# Altium PCB PCB走線.pcbdoc (part 2 of 2)
Units mm, origin at the board's own origin, x right, y up, seen from the top; angles counter-clockwise.
Board outline 119.98 x 131.06 mm, 2 copper layers (Top Layer, Bottom Layer); 151 components, 85 nets, 449 pads, 663 vias.
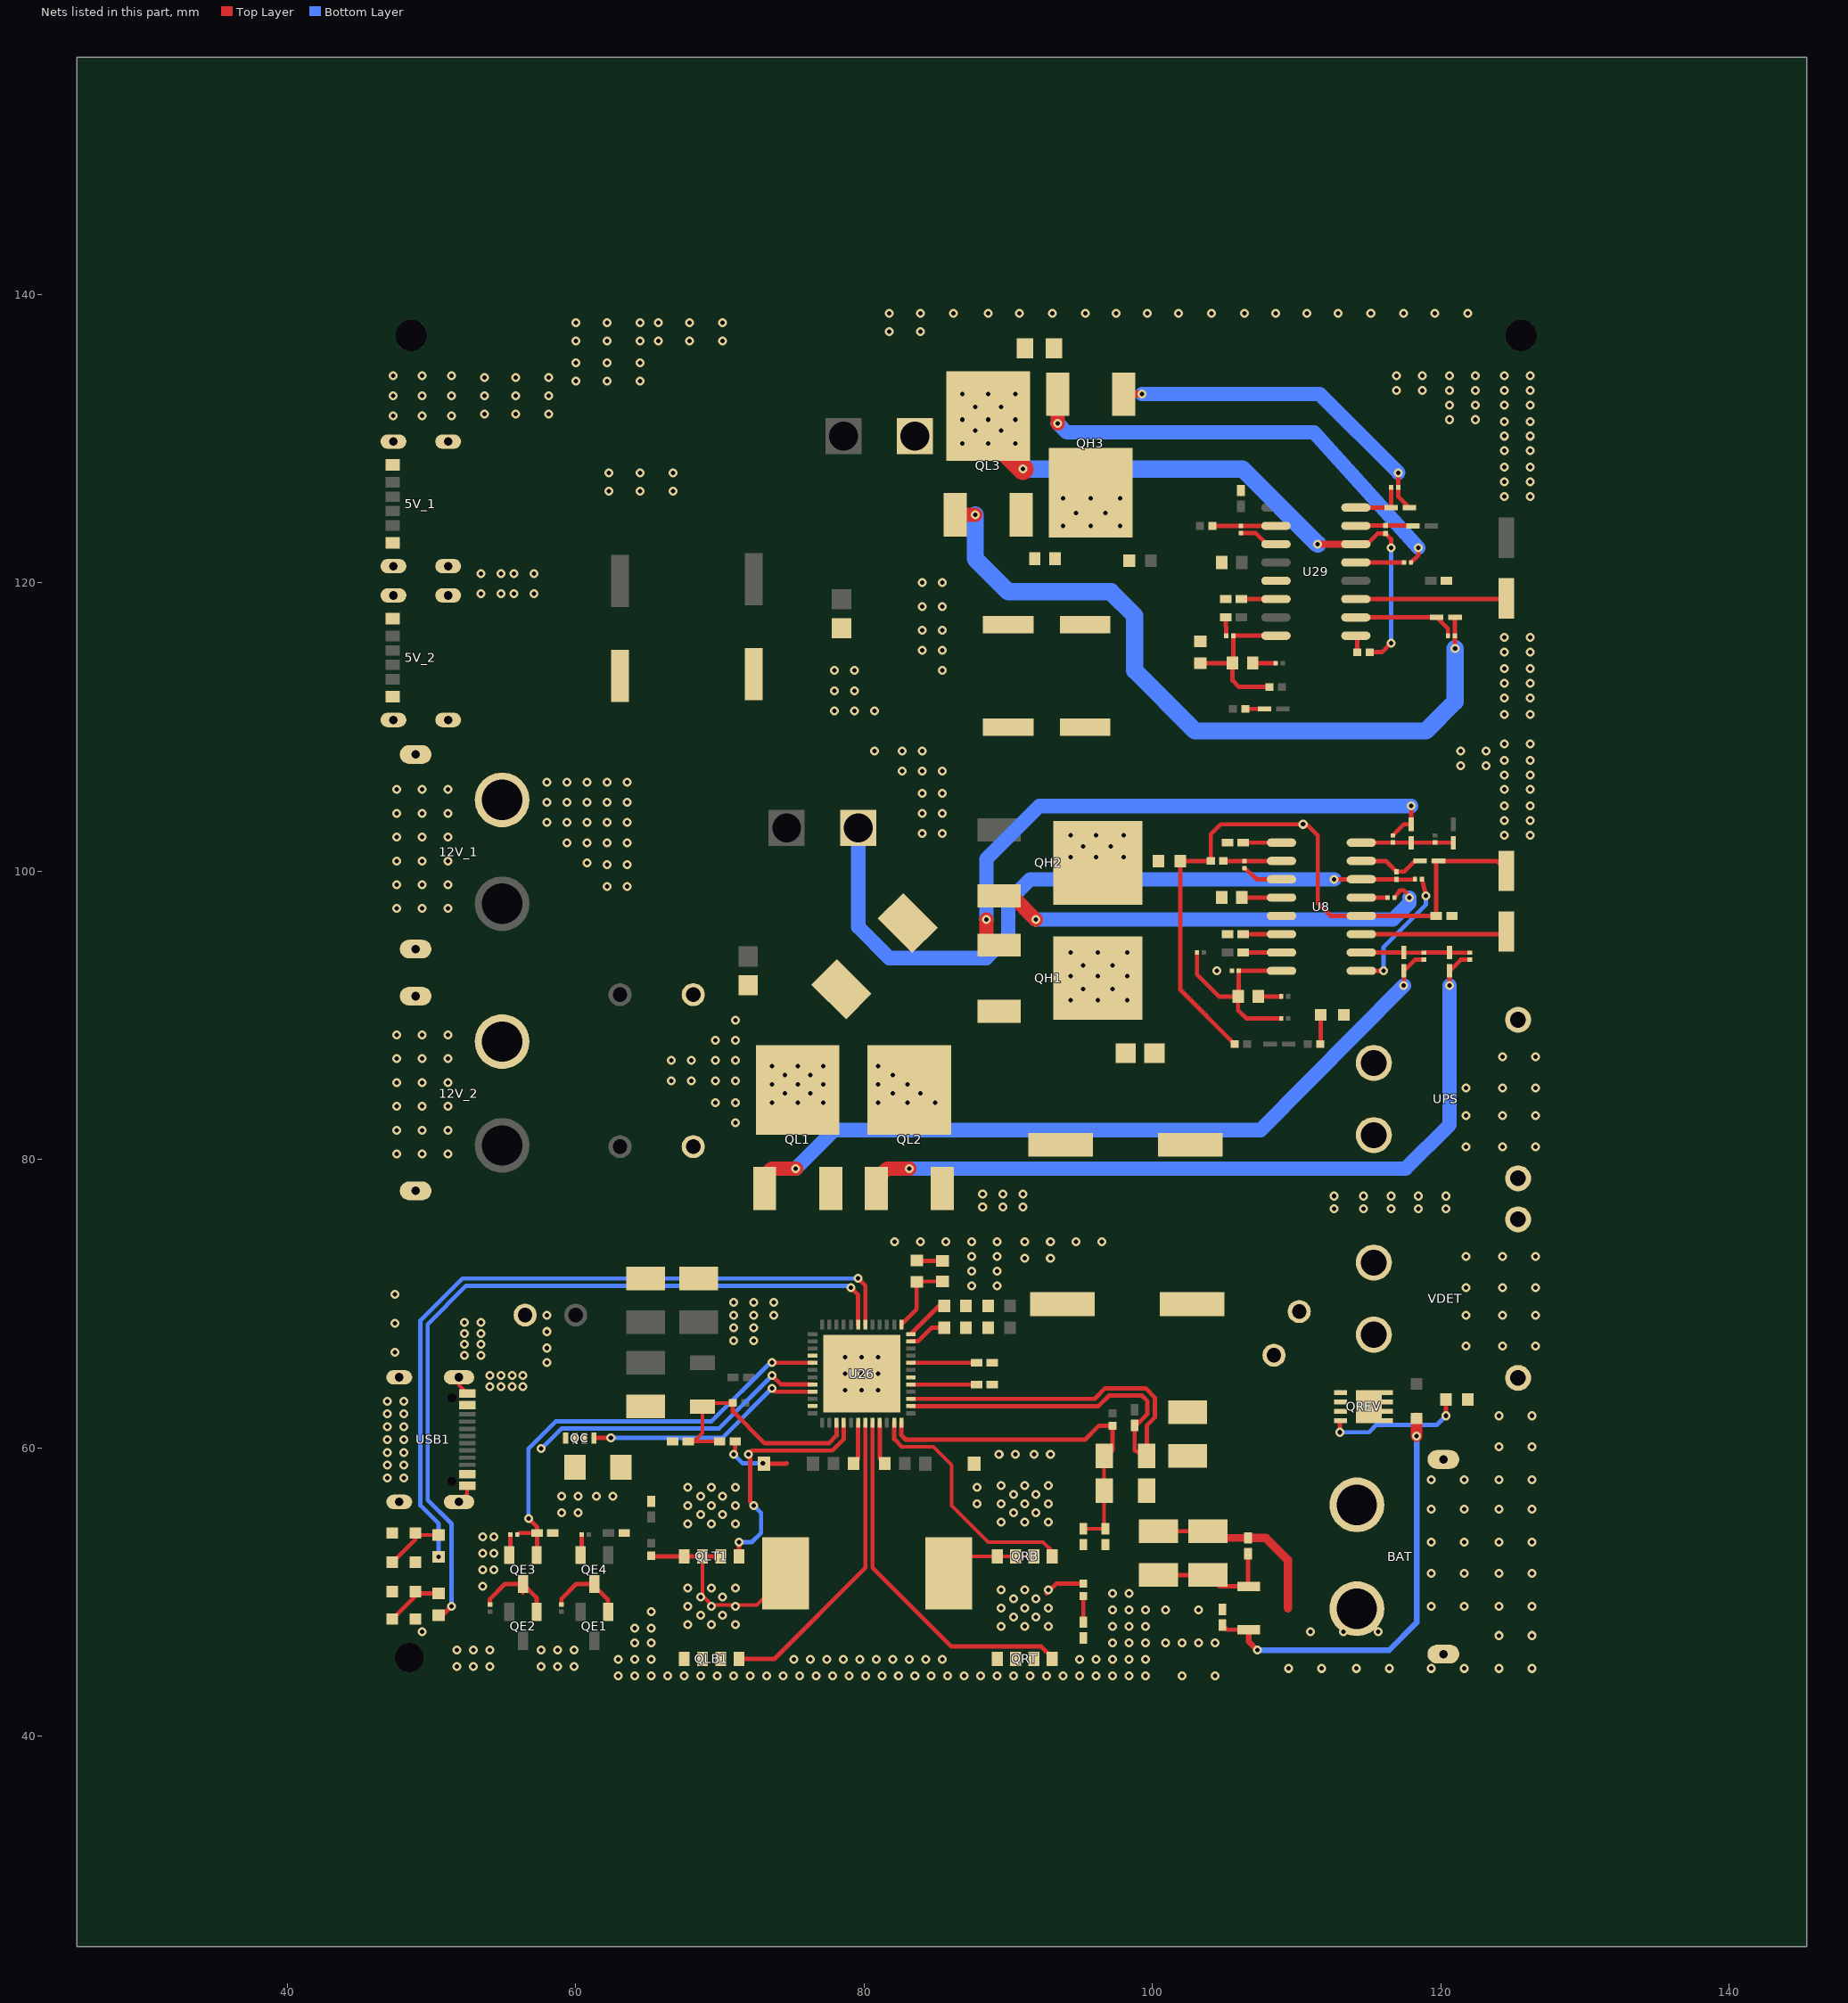
[diagram p2: the nets of this part, all layers, seen from the top]

## Via types
v1: diameter 0.62, hole 0.31, Top Layer to Bottom Layer, tented both sides, 659 vias
v2: diameter 0.61, hole 0.305, Top Layer to Bottom Layer, tented both sides, 4 vias

## Nets (pads, with @x,y where several pads share a name; then routed paths per layer and width w, separated by ;. In a path a pad name is that pad's centre, name@x,y a point inside that pad or via, vN(x,y) a via of type N, cw(c..) or ccw(c..) an arc to the next point about the centre after c; other vN are vias at no path point) (continued)
GND: 5V_1.1 5V_1.2 5V_1.A12 5V_1.B12 5V_2.1 5V_2.2 5V_2.A12 5V_2.B12 12V_1.1 12V_1.2 12V_1.4 12V_2.1 12V_2.2 12V_2.4 12V_LED.1 BAT.1 BAT.2 BAT.4 C5V1.2 C5V2.2 C5V3.2 C12V1.2 C12V2.2 C12V3.2 C12V4.2 C12V5.2 C12V6.1 C18V1.2 C18V2.2 C18V3.2 CC1.2 CC2.2 CCP1.1 CCP2.1 CE1.1 CE2.1 CL1.2 CL2.1 CL3.1 CL4.1 CL7.1 CLQ1.1 CLQ2.1 CNTC.2 CR1.2 CR2.1 CR3.1 CR4.1 CREF1.2 CREF2.2 CRQ1.1 CRQ2.1 CSS1.1 CSS2.1 CVC1.1 CVC2.1 CVC3.1 CVC4.1 CVCC1.2 CVCC2.2 CVCC3.2 CVCC4.2 D13.2 D14.2 LDO.1 LED1.2 LED2.1 LED3.2 LED4.1 QE3.2 QE4.2 QL1.3 QL2.3 QL3.3 QLB1.1 QLB1.2 QLB1.3 QRT.1 QRT.2 QRT.3 R3.1 RBAT_NUM.2 RCAP.2 RDIV3.1 RDIV5.2 RDIV8.1 RDIV10.1 RE3.2 RE4.2 RISET.2 RNTC.2 RVSET.2 U8.3 U8.5 U8.11 U26.4 U26.11 U26.30 U26.49 U29.3 U29.5 U29.11 UPS.1 UPS.3 UPS.4 USB1.1 USB1.2 USB1.3 USB1.4 USB1.A1B12 USB1.B1A12 VDET.1 VDET.3 VDET.4 | length 47.5
  Top Layer w0.254: USB1.2@51.915,56.259 52.49,56.835 USB1.B1A12@52.49,57.379 ; USB1.1@51.915,64.899 51.916,64.353 USB1.A1B12@52.49,63.779
  Top Layer w0.3: QE3.2@55.4,52.562 55.474,52.636 RE3.2@55.474,53.993 ; QE4.2@60.353,52.562 60.427,52.636 RE4.2@60.427,53.993 ; v1(70.955,59.563) 71.075,59.682 CLQ1.1@71.075,60.452 ; v1(72.987,58.928) 73.014,58.901 D13.2@73.073,58.901 74.611,58.901 74.638,58.928 ; RNTC.2@83.655,73.016 83.709,72.964 CNTC.2@85.433,72.963 ; CR3.1@100.419,51.188 CR2.1@103.848,51.188 104.641,50.396 106.683,50.396 106.642,50.434 CVC3.1@106.642,52.668 ; RDIV8.1@106.134,123.456 107.138,123.457 107.912,122.682 U29.3@108.572,122.682 ; RDIV3.1@106.388,100.215 107.277,99.441 U8.3@108.953,99.441 ; U29.11@114.11,118.872 124.549,118.872 CVCC4.2@124.549,118.931 ; U8.11@114.491,95.631 124.364,95.631 CVCC2.2@124.549,95.817
  Bottom Layer w0.3: v1(70.955,59.563) 71.59,58.928 v1(72.987,58.928)
  other v1: 62.954,44.196 64.097,44.196 65.24,44.196 66.383,44.196 67.526,44.196 68.669,44.196 69.812,44.196 70.955,44.196 72.098,44.196 73.241,44.196 74.384,44.196 75.527,44.196 76.67,44.196 77.813,44.196 78.956,44.196 80.099,44.196 81.242,44.196 82.385,44.196 83.528,44.196 84.671,44.196 85.814,44.196 86.957,44.196 88.1,44.196 89.243,44.196 90.386,44.196 91.529,44.196 92.672,44.196 93.815,44.196 94.958,44.196 96.101,44.196 97.244,44.196 98.387,44.196 99.53,44.196 102.07,44.196 104.356,44.196 109.436,44.704 111.722,44.704 114.135,44.704 116.421,44.704 119.342,44.704 121.628,44.704 124.041,44.704 126.327,44.704 51.778,44.831 52.921,44.831 54.064,44.831 57.62,44.831 58.763,44.831 59.906,44.831 62.954,45.339 64.097,45.339 65.24,45.339 75.146,45.339 76.289,45.339 77.432,45.339 78.575,45.339 79.718,45.339 80.861,45.339 82.004,45.339 83.147,45.339 84.29,45.339 85.433,45.339 94.958,45.339 96.101,45.339 97.244,45.339 98.387,45.339 99.53,45.339 51.778,45.974 52.921,45.974 54.064,45.974 57.62,45.974 58.763,45.974 59.906,45.974 64.097,46.482 65.24,46.482 97.244,46.482 98.387,46.482 99.53,46.482 100.927,46.482 102.07,46.482 103.213,46.482 104.356,46.482 124.041,46.99 126.327,46.99 110.96,47.244 113.246,47.244 115.659,47.244 64.097,47.498 65.24,47.498 97.244,47.625 98.387,47.625 99.53,47.625 65.24,48.641 97.244,48.768 98.387,48.768 99.53,48.768 100.927,48.768 103.213,48.768 119.342,49.022 121.628,49.022 124.041,49.022 126.327,49.022 97.244,49.911 98.387,49.911 53.556,50.419 119.342,51.308 121.628,51.308 124.041,51.308 126.327,51.308 53.556,51.562 54.318,51.562 53.556,52.705 54.318,52.705 119.342,53.467 121.628,53.467 124.041,53.467 126.327,53.467 53.556,53.848 54.318,53.848 59.017,55.499 60.16,55.499 119.342,55.753 121.628,55.753 124.041,55.753 126.327,55.753 87.846,56.134 59.017,56.642 60.16,56.642 61.43,56.642 62.573,56.642 87.846,57.277 119.342,57.785 121.628,57.785 124.041,57.785 126.327,57.785 46.952,57.912 48.095,57.912 46.952,58.801 48.095,58.801 89.37,59.563 90.513,59.563 91.783,59.563 92.926,59.563 46.952,59.69 48.095,59.69 124.041,60.071 126.327,60.071 46.952,60.579 48.095,60.579 46.952,61.468 48.095,61.468 124.041,62.23 126.327,62.23 46.952,62.357 48.095,62.357 46.952,63.246 48.095,63.246 78.702,64.008 79.845,64.008 80.988,64.008 54.064,64.262 54.826,64.262 55.588,64.262 56.35,64.262 54.064,65.024 54.826,65.024 55.588,65.024 56.35,65.024 78.702,65.151 79.845,65.151 80.988,65.151 58.001,65.913 78.702,66.294 79.845,66.294 80.988,66.294 52.286,66.421 53.429,66.421 58.001,66.929 121.755,67.056 124.295,67.056 126.581,67.056 52.286,67.183 53.429,67.183 70.955,67.437 72.352,67.437 52.286,67.945 53.429,67.945 58.001,68.072 70.955,68.326 72.352,68.326 52.286,68.707 53.429,68.707 58.001,69.215 70.955,69.215 72.352,69.215 73.749,69.215 121.755,69.215 124.295,69.215 126.581,69.215 70.955,70.104 72.352,70.104 73.749,70.104 121.755,71.12 124.295,71.12 126.581,71.12 87.465,71.247 89.243,71.247 87.465,72.263 89.243,72.263 91.148,73.152 92.926,73.152 87.465,73.279 89.243,73.279 121.755,73.279 124.295,73.279 126.581,73.279 82.131,74.295 83.909,74.295 85.687,74.295 87.465,74.295 89.243,74.295 91.148,74.295 92.926,74.295 94.704,74.295 96.482,74.295 112.611,76.581 114.643,76.581 116.548,76.581 118.453,76.581 120.358,76.581 88.227,76.708 89.624,76.708 91.021,76.708 112.611,77.47 114.643,77.47 116.548,77.47 118.453,77.47 120.358,77.47 88.227,77.597 89.624,77.597 91.021,77.597 47.587,80.391 49.365,80.391 51.143,80.391 121.755,80.899 124.295,80.899 126.581,80.899 47.587,82.042 49.365,82.042 51.143,82.042 71.082,82.55 121.755,83.058 124.295,83.058 126.581,83.058 47.587,83.693 49.365,83.693 51.143,83.693 69.685,83.947 71.082,83.947 121.755,84.963 124.295,84.963 126.581,84.963 47.587,85.344 49.365,85.344 51.143,85.344 66.637,85.471 68.034,85.471 69.685,85.471 71.082,85.471 66.637,86.868 68.034,86.868 69.685,86.868 71.082,86.868 47.587,86.995 49.365,86.995 51.143,86.995 124.295,87.122 126.581,87.122 69.685,88.265 71.082,88.265 47.587,88.646 49.365,88.646 51.143,88.646 71.082,89.662 104.483,93.091 47.587,97.409 49.365,97.409 51.143,97.409 62.192,98.933 63.589,98.933 47.587,99.06 49.365,99.06 51.143,99.06 62.192,100.457 63.589,100.457 60.795,100.584 47.587,100.711 49.365,100.711 51.143,100.711 59.398,101.981 60.795,101.981 62.192,101.981 63.589,101.981 47.587,102.362 49.365,102.362 51.143,102.362 124.422,102.489 126.2,102.489 84.036,102.616 85.433,102.616 58.001,103.378 59.398,103.378 60.795,103.378 62.192,103.378 63.589,103.378 124.422,103.505 126.2,103.505 47.587,104.013 49.365,104.013 51.143,104.013 84.036,104.013 85.433,104.013 124.422,104.521 126.2,104.521 58.001,104.775 59.398,104.775 60.795,104.775 62.192,104.775 63.589,104.775 84.036,105.41 85.433,105.41 47.587,105.664 49.365,105.664 51.143,105.664 124.422,105.664 126.2,105.664 58.001,106.172 59.398,106.172 60.795,106.172 62.192,106.172 63.589,106.172 124.422,106.68 126.2,106.68 82.639,106.934 84.036,106.934 85.433,106.934 121.374,107.315 123.152,107.315 124.422,107.696 126.2,107.696 80.734,108.331 82.639,108.331 84.036,108.331 121.374,108.331 123.152,108.331 124.422,108.839 126.2,108.839 124.422,110.871 126.2,110.871 77.94,111.125 79.337,111.125 80.734,111.125 124.422,112.014 126.2,112.014 77.94,112.522 79.337,112.522 124.422,113.03 126.2,113.03 77.94,113.919 79.337,113.919 85.433,113.919 124.422,114.046 126.2,114.046 124.422,115.189 126.2,115.189 84.036,115.316 85.433,115.316 124.422,116.205 126.2,116.205 84.036,116.713 85.433,116.713 84.036,118.364 85.433,118.364 53.429,119.253 54.826,119.253 55.715,119.253 57.112,119.253 84.036,120.015 85.433,120.015 53.429,120.65 54.826,120.65 55.715,120.65 57.112,120.65 124.422,125.984 126.2,125.984 62.319,126.365 64.478,126.365 66.764,126.365 124.422,127 126.2,127 62.319,127.635 64.478,127.635 66.764,127.635 124.422,128.016 126.2,128.016 124.422,129.159 126.2,129.159 124.422,130.175 126.2,130.175 124.422,131.191 126.2,131.191 120.612,131.318 122.39,131.318 47.333,131.572 49.365,131.572 51.397,131.572 53.683,131.699 55.842,131.699 58.128,131.699 120.612,132.334 122.39,132.334 124.422,132.334 126.2,132.334 47.333,132.969 49.365,132.969 51.397,132.969 53.683,132.969 55.842,132.969 58.128,132.969 116.929,133.35 118.707,133.35 120.612,133.35 122.39,133.35 124.422,133.35 126.2,133.35 60.033,133.985 62.192,133.985 64.478,133.985 53.683,134.239 55.842,134.239 58.128,134.239 47.333,134.366 49.365,134.366 51.397,134.366 116.929,134.366 118.707,134.366 120.612,134.366 122.39,134.366 124.422,134.366 126.2,134.366 60.033,135.255 62.192,135.255 64.478,135.255 60.033,136.779 62.192,136.779 64.478,136.779 65.748,136.779 67.907,136.779 70.193,136.779 81.75,137.414 83.909,137.414 60.033,138.049 62.192,138.049 64.478,138.049 65.748,138.049 67.907,138.049 70.193,138.049 81.75,138.684 83.909,138.684 86.195,138.684 88.608,138.684 90.767,138.684 93.053,138.684 95.339,138.684 97.498,138.684 99.657,138.684 101.816,138.684 104.102,138.684 106.388,138.684 108.547,138.684 110.706,138.684 112.865,138.684 115.151,138.684 117.437,138.684 119.596,138.684 121.882,138.684
  other v2: 49.365,47.244 47.46,66.644 47.46,68.644 47.46,70.644
HG1: QLT1.4 U26.16 | length 16.8
  Top Layer w0.3: QLT1.4@71.336,52.481 v1(71.336,53.467) ; v1(72.352,56.007) 72.098,56.261 72.098,59.436 v1(71.971,59.563) 72.225,59.817 77.813,59.817 78.596,60.599 U26.16@78.595,61.744
  Bottom Layer w0.3: v1(71.336,53.467) 72.225,53.467 72.86,54.102 72.86,55.499 v1(72.352,56.007)
HG2: QRB.4 U26.23 | length 17.3
  Top Layer w0.254: 82.639,60.071 84.798,60.071 86.068,58.801 86.068,56.007 88.608,53.467 92.418,53.467 93.053,52.832 QRB.4@93.053,52.481
  Top Layer w0.3: U26.23@82.095,61.744 82.096,60.615 82.639,60.071
HLED: CE1.2 QE3.1 RE3.1 U26.5 | length 31.2
  Top Layer w0.3: RE3.1@55.957,53.993 56.096,54.102 CE1.2@57.328,54.102 ; v1(56.731,55.118) 57.328,54.521 CE1.2@57.328,54.102 ; QE3.1@57.3,52.562 57.328,52.591 CE1.2@57.328,54.102 ; v1(73.622,65.913) 76.427,65.913 U26.5@76.437,65.9
  Bottom Layer w0.3: v1(56.731,55.118) 56.731,59.944 58.636,61.849 69.431,61.849 73.495,65.913 v1(73.622,65.913)
ISET: RISET.1 U26.36 | length 3.1
  Top Layer w0.3: U26.36@83.253,67.901 85.202,69.85 RISET.1@85.568,69.85
LDO_3: CVC4.2 DEMK.2 LDO.3 | length 29.6
  Top Layer w0.3: CVC4.2@104.864,47.715 105.184,47.394 LDO.3@106.683,47.395
  Top Layer w0.4: LDO.3@106.683,47.395 106.683,46.568 v1(107.277,45.974)
  Top Layer w0.8: v1(118.326,60.833) DEMK.2@118.326,62.046
  Bottom Layer w0.4: v1(107.277,45.974) 116.421,45.974 118.326,47.879 v1(118.326,60.833)
LG1: QLB1.4 U26.19 | length 21.4
  Top Layer w0.3: QLB1.4@71.336,45.369 73.78,45.369 80.094,51.684 U26.19@80.094,61.742
LG2: QRT.4 U26.20 | length 25.2
  Top Layer w0.3: U26.20@80.595,61.744 80.595,51.702 86.068,46.228 92.291,46.228 93.053,45.466 QRT.4@93.053,45.369
LX1: CBSL.1 L3.1 QLT1.1 QLT1.2 QLT1.3 RC1.1 U26.18 | length 17.6
  Top Layer w0.254: QLT1.2@68.796,52.481 68.796,49.754 69.431,49.119 72.578,49.119 L3.1@74.704,51.244
  Top Layer w0.3: RC1.1@65.24,52.526 65.286,52.481 QLT1.3@70.066,52.481 ; CBSL.1@79.275,58.928 79.596,59.248 U26.18@79.595,61.744
  other v1: 67.78,47.752 69.431,47.752 71.082,47.752 68.669,48.387 70.193,48.387 67.78,49.022 69.431,49.022 71.082,49.022 68.669,49.657 70.193,49.657 67.78,50.292 69.431,50.292 71.082,50.292
LX2: CBSR.2 L3.2 QRB.1 QRB.2 QRB.3 RC2.1 U26.21 | length 12.1
  Top Layer w0.254: L3.2@86.002,51.244 87.239,52.481 QRB.3@91.783,52.481
  Top Layer w0.3: U26.21@81.095,61.744 81.095,59.263 CBSR.2@81.43,58.928 ; v1@92.672,49.911 93.358,50.597 RC2.1@95.212,50.598
  other v1: 89.497,47.625 91.148,47.625 92.799,47.625 90.386,48.26 91.91,48.26 89.497,48.895 91.148,48.895 92.799,48.895 90.386,49.53 91.91,49.53 89.497,50.165 91.148,50.165 92.799,50.165
PCON: CRQ1.2 CRQ2.2 RSC2.1 RSCR1.1 RSCR2.1 U26.24 | length 25.1
  Top Layer w0.254: CRQ1.2@95.212,54.393 CRQ2.2@96.736,54.393 96.655,54.475 RSCR2.1@96.655,57.023 RSCR1.1@96.655,59.436
  Top Layer w0.3: U26.24@82.595,61.744 82.596,60.876 82.893,60.579 95.339,60.579 96.305,61.544 RSC2.1@97.244,61.543 97.244,59.817 RSCR1.1@96.655,59.436
  other v1: 89.497,54.864 91.148,54.864 92.799,54.864 90.386,55.499 91.91,55.499 89.497,56.134 91.148,56.134 92.799,56.134 90.386,56.769 91.91,56.769 89.497,57.404 91.148,57.404 92.799,57.404
QC_4: QC.4 U26.9 | length 16.7
  Top Layer w0.3: QC.4@61.262,60.689 61.281,60.706 v1(62.446,60.706) ; v1(73.622,64.135) 73.856,63.901 U26.9@76.437,63.901
  Bottom Layer w0.3: v1(62.446,60.706) 70.193,60.706 v1(73.622,64.135)
QE2_1: QE2.1 QE3.3 RE2.1 | length 6
  Top Layer w0.254: QE3.3@56.35,49.956 QE3.3@56.35,50.562
  Top Layer w0.3: RE2.1@54.064,49.137 54.064,49.53 55.096,50.561 QE3.3@56.35,50.562 57.11,49.802 57.3,49.611 QE2.1@57.3,48.625
QH1_1: DQH1.2 QH1.1 RQH1.2 | length 40.7
  Top Layer w0.3: RQH1.2@116.675,102.477 117.45,103.251 DQH1.2@117.945,103.251 v1(117.945,104.521)
  Top Layer w1: v1(88.481,96.647) 88.481,94.874 QH1.1@89.376,94.873
  Bottom Layer w1: v1(88.481,96.647) 88.481,100.838 92.164,104.521 111.147,104.521 v1(117.945,104.521)
QH1_3: QH1.3 QH2.3 RQ1.2 RSDHIN1.2 | length 31.5
  Top Layer w0.3: RSDHIN1.2@116.79,98.171 117.183,98.679 117.437,98.679 117.818,98.298 v1(117.818,98.171)
  Top Layer w1: QH2.3@89.376,98.294 90.264,98.293 v1(91.91,96.647)
  Bottom Layer w1: v1(91.91,96.647) 116.675,96.647 117.818,97.79 v1(117.818,98.171)
QH3_1: DQH3.2 QH3.1 RQH3.2 | length 24
  Top Layer w0.3: v1(117.056,127.635) 117.056,126.632 RQH3.2@117.044,126.619 117.044,125.997 DQH3.2@117.818,125.222
  Top Layer w0.5: QH3.1@98.01,133.091 98.017,133.096 v1(99.276,133.096)
  Bottom Layer w1: v1(99.276,133.096) 111.595,133.096 v1(117.056,127.635)
QH3_3: QH3.3 QR2.2 RSDHIN2.2 | length 32.1
  Top Layer w0.3: RSDHIN2.2@117.933,121.412 118.453,121.933 v1(118.453,122.428)
  Top Layer w1: QH3.3@93.429,133.091 93.434,133.086 v1(93.434,131.064)
  Bottom Layer w1: v1(93.434,131.064) 94.069,130.429 111.214,130.429 v1(118.453,122.428)
QL1_1: DQL1.2 QL1.1 RLQ1.2 | length 53.4
  Top Layer w0.3: v1(117.437,92.075) DQL1.2@117.437,93.091 118.212,93.866 RLQ1.2@118.834,93.865
  Top Layer w1: QL1.1@73.109,77.983 73.109,78.862 73.622,79.375 v1(75.273,79.375)
  Bottom Layer w1: v1(75.273,79.375) 77.94,82.042 107.503,82.042 v1(117.437,92.075)
QL1_2: CVS1.2 L1.1 QL1.2 QL2.2 RQ1.1 RSDLIN1.2 U8.14 | length 50.1
  Top Layer w0.3: v1(112.611,99.441) U8.14@114.491,99.441 116.909,99.441 CVS1.2@116.929,99.421 118.192,99.421 RSDLIN1.2@118.212,99.441
  Bottom Layer w1: L1.1@79.598,102.997 79.599,96.131 81.75,93.98 88.481,93.98 90.005,95.504 90.005,97.917 91.529,99.441 v1(112.611,99.441)
  other v1: 73.622,83.947 75.4,83.947 77.178,83.947 80.988,83.947 83.02,83.947 84.925,83.947 74.511,84.582 76.289,84.582 82.004,84.582 83.909,84.582 73.622,85.217 75.4,85.217 77.178,85.217 80.988,85.217 83.02,85.217 74.511,85.852 76.289,85.852 82.004,85.852 73.622,86.487 75.4,86.487 77.178,86.487 80.988,86.487
QL2_1: DQL2.2 QL2.1 RLQ2.2 | length 54.3
  Top Layer w0.3: v1(120.612,92.075) DQL2.2@120.612,93.091 121.387,93.866 RLQ2.2@122.009,93.865
  Top Layer w1: QL2.1@80.856,77.983 80.856,78.608 81.623,79.375 v1(83.147,79.375)
  Bottom Layer w1: v1(83.147,79.375) 117.564,79.375 120.612,82.423 v1(120.612,92.075)
QL3_1: DQL4.2 QL3.1 RQL4.2 | length 51.6
  Top Layer w0.3: v1(120.993,115.443) RQL4.2@120.981,116.332 120.981,117.589 DQL4.2@120.993,117.602
  Top Layer w1: QL3.1@86.317,124.719 87.714,124.719 v1(87.719,124.714)
  Bottom Layer w1.2: v1(87.719,124.714) 87.719,121.666 90.005,119.38 97.117,119.38 98.768,117.729 98.768,113.919 102.959,109.728 118.961,109.728 120.993,111.76 v1(120.993,115.443)
QL3_2: CVS2.2 L2.1 QL3.2 QR2.1 RSDLIN2.2 U29.14 | length 41.8
  Top Layer w0.3: U29.14@114.11,122.682 114.897,122.682 115.639,123.424 CVS2.2@116.167,123.424 116.548,123.043 v1(116.548,122.428) ; RSDLIN2.2@115.075,115.189 115.913,115.189 v1(116.548,115.824)
  Top Layer w0.5: v1(111.468,122.682) U29.14@114.11,122.682
  Top Layer w1.5: QL3.2@88.608,131.567 88.608,130.302 v1(91.021,127.889)
  Bottom Layer w0.3: v1(116.548,115.824) 116.548,117.729 v1(116.548,122.428)
  Bottom Layer w1.2: v1(91.021,127.889) 106.261,127.889 v1(111.468,122.682)
  other v1: 86.83,129.667 88.608,129.667 90.513,129.667 87.719,130.556 89.497,130.556 86.83,131.318 88.608,131.318 90.513,131.318 87.719,132.207 89.497,132.207 86.83,133.096 88.608,133.096 90.513,133.096
QLT1_5: CLQ1.2 CLQ2.2 RSC1.1 RSCL1.2 U26.15 | length 16.8
  Top Layer w0.254: CLQ2.2@67.9,60.452 CLQ1.2@70.066,60.452 ; CLQ2.2@68.2,60.452 68.796,61.049 RSCL1.2@68.796,62.865 69.05,63.119 RSC1.1@70.904,63.119
  Top Layer w0.3: RSC1.1@70.904,63.119 70.905,62.535 73.114,60.325 77.559,60.325 78.095,60.861 U26.15@78.095,61.744
  other v1: 67.78,54.737 69.431,54.737 71.082,54.737 68.669,55.372 70.193,55.372 67.78,56.007 69.431,56.007 71.082,56.007 68.669,56.642 70.193,56.642 67.78,57.277 69.431,57.277 71.082,57.277
QREV_4: QREV.4 R3.2 | length 9.8
  Top Layer w0.3: v1(112.992,61.087) 112.992,61.839 QREV.4@113.043,61.89 ; v1(120.358,62.23) 120.366,62.238 R3.2@120.366,63.373
  Bottom Layer w0.3: v1(112.992,61.087) 115.024,61.087 115.532,61.595 119.723,61.595 v1(120.358,62.23)
QREV_5: BAT.3 QREV.5 QREV.6 QREV.7 QREV.8 QREV.9
R12V_2: 12V_LED.2 R12V.2 | length 2
  Top Layer w0.3: R12V.2@111.646,88.011 111.684,88.049 12V_LED.2@111.685,90.039
R35_1: LED1.1 LED2.2 R35.1 | length 4.2
  Top Layer w0.3: LED1.1@47.296,48.133 48.896,49.731 LED2.2@48.895,50.038 49.03,49.903 R35.1@50.508,49.902
R36_1: LED3.1 LED4.2 R36.1 | length 4.4
  Top Layer w0.254: LED4.2@48.895,54.102 49.03,53.967 R36.1@50.508,53.966
  Top Layer w0.3: LED3.1@47.296,52.07 48.896,53.668 LED4.2@48.895,54.102
R_RDIV4_1: C_RDIV4.2 R_RDIV4.1 | length 1.6
  Top Layer w0.3: C_RDIV4.2@107.342,91.313 R_RDIV4.1@108.941,91.313
R_RDIV9_1: C_RDIV9.2 R_RDIV9.1 | length 1.6
  Top Layer w0.3: C_RDIV9.2@106.961,114.427 R_RDIV9.1@108.56,114.427
RC2_2: CC2.1 RC2.2 | length 1.8
  Top Layer w0.254: CC2.1@95.212,47.916 RC2.2@95.212,49.732
RE1_1: QE1.1 QE4.3 RE1.1 | length 5.4
  Top Layer w0.3: RE1.1@59.017,49.137 59.017,49.53 60.049,50.561 QE4.3@61.303,50.562 61.303,50.419 62.253,49.469 QE1.1@62.253,48.625
RERRO2_1: C_RDIV9.1 RDIV9.1 RDIV10.2 RERRO2.1 U29.8 | length 11.1
  Top Layer w0.3: RDIV10.2@103.34,114.436 103.348,114.427 C_RDIV9.1@105.56,114.427 ; RDIV9.1@108.115,112.776 106.007,112.776 105.56,113.223 C_RDIV9.1@105.56,114.427 ; U29.8@108.572,116.332 RERRO2.1@105.614,116.332 105.614,114.48 C_RDIV9.1@105.56,114.427
RERRO2_2: CERRO2.1 RERRO2.2 | length 1.3
  Top Layer w0.3: CERRO2.1@105.08,117.602 RERRO2.2@105.131,116.332
RVCC2_1: DVCC2.1 RVCC2.1 | length 1.3
  Top Layer w0.3: RVCC2.1@106.439,111.252 DVCC2.1@107.785,111.252
SCL: R35.2 U26.43 | length 54.7
  Top Layer w0.3: R35.2@50.508,48.396 50.771,48.396 v1(51.397,49.022) ; v1(79.083,71.12) 79.591,70.612 U26.43@79.595,68.559
  Bottom Layer w0.3: v1(51.397,49.022) 51.397,54.737 49.746,56.388 49.746,68.58 52.413,71.247 79.083,71.247 v1(79.083,71.12)
SDA: R36.2 U26.42 | length 51.9
  Top Layer w0.3: v1(79.591,71.755) 80.094,71.252 U26.42@80.094,68.56
  Bottom Layer w0.3: v1(50.508,52.451) 50.508,54.737 49.238,56.007 49.238,68.834 52.159,71.755 v1(79.591,71.755)
U8_1: CREF1.1 U8.1 | length 2.7
  Top Layer w0.3: CREF1.1@106.298,101.981 U8.1@108.953,101.981
U8_2: RDIV2.1 RDIV3.2 U8.2 | length 4
  Top Layer w0.3: RDIV2.1@104.916,100.711 106.376,100.711 RDIV3.2@106.388,100.699 108.941,100.698 U8.2@108.953,100.711
U8_4: CSS1.2 U8.4 | length 2.8
  Top Layer w0.3: CSS1.2@106.199,98.171 U8.4@108.953,98.171
U8_6: CCP1.2 U8.6 | length 2.7
  Top Layer w0.3: CCP1.2@106.298,95.631 U8.6@108.953,95.631
U8_7: CERRO1.2 U8.7 | length 2.7
  Top Layer w0.3: CERRO1.2@106.298,94.361 U8.7@108.953,94.361
U8_8: C_RDIV4.1 RDIV4.1 RDIV5.1 RERRO1.1 U8.8 | length 14
  Top Layer w0.3: RERRO1.1@103.099,94.361 103.099,92.824 104.61,91.313 C_RDIV4.1@105.941,91.313 ; RDIV5.1@105.969,93.091 U8.8@108.928,93.091 ; RDIV5.1@105.995,93.091 105.995,91.366 C_RDIV4.1@105.941,91.313 ; RDIV4.1@108.941,89.789 106.515,89.789 105.941,90.363 C_RDIV4.1@105.941,91.313
U8_9: RSDLIN1.1 U8.9 | length 9.1
  Top Layer w0.3: U8.9@114.491,93.091 v1(116.04,93.091) ; RSDLIN1.1@118.707,99.441 v1(118.961,98.298)
  Bottom Layer w0.3: v1(116.04,93.091) 116.04,94.742 118.961,97.663 v1(118.961,98.298)
U8_10: DQL1.1 DQL2.1 RLQ1.1 RLQ2.1 U8.10 | length 7.5
  Top Layer w0.3: U8.10@114.491,94.361 DQL1.1@117.437,94.361 117.45,94.348 RLQ1.1@118.834,94.349 118.847,94.361 DQL2.1@120.612,94.361 RLQ2.1@122.009,94.349
U8_12: CVCC1.1 CVCC2.1 DVB1.2 RDIV1.1 RDIV2.2 RVCC1.2 U8.12 | length 48.7
  Top Layer w0.3: RVCC1.2@105.702,88.011 101.936,91.778 RDIV1.1@101.935,100.711 RDIV2.2@104.051,100.711 104.052,102.565 104.737,103.251 v1(110.452,103.251) 110.706,103.251 111.468,102.489 111.468,97.79 112.357,96.901 U8.12@114.491,96.901 119.685,96.901 DVB1.2@119.685,100.711 ; DVB1.2@119.469,100.711 123.856,100.711 CVCC2.1@124.549,100.017
U8_13: RSDHIN1.1 U8.13 | length 1.8
  Top Layer w0.3: U8.13@114.491,98.171 RSDHIN1.1@116.307,98.171
U8_15: CVS1.1 DVB1.1 U8.15 | length 4.3
  Top Layer w0.3: U8.15@114.491,100.711 116.188,100.711 CVS1.1@116.929,99.969 117.458,99.969 DVB1.1@118.199,100.711
U8_16: DQH1.1 DQH2.1 RQH1.1 RQH2.1 U8.16 | length 6.4
  Top Layer w0.3: U8.16@114.491,101.981 RQH1.1@116.675,101.993 DQH1.1@117.945,101.981 RQH2.1@119.596,101.993 DQH2.1@120.866,101.981
U26_37: CNTC.1 RNTC.1 U26.37 | length 5.2
  Top Layer w0.254: RNTC.1@83.655,71.51 83.709,71.562 CNTC.1@85.433,71.563
  Top Layer w0.3: U26.37@82.595,68.559 83.655,69.619 RNTC.1@83.655,71.51
U29_2: RDIV7.1 RDIV8.2 U29.2 | length 4.4
  Top Layer w0.3: RDIV7.1@104.153,123.952 106.122,123.952 RDIV8.2@106.134,123.94 108.56,123.939 U29.2@108.572,123.952
U29_6: CCP2.2 U29.6 | length 2.4
  Top Layer w0.3: CCP2.2@106.171,118.872 U29.6@108.572,118.872
U29_9: RSDLIN2.1 U29.9 | length 1.2
  Top Layer w0.3: U29.9@114.11,116.332 114.212,116.23 RSDLIN2.1@114.211,115.189
U29_10: DQL4.1 RQL4.1 U29.10 | length 7.2
  Top Layer w0.3: U29.10@114.11,117.602 DQL4.1@119.723,117.602 120.498,116.827 RQL4.1@120.498,116.332
U29_13: RSDHIN2.1 U29.13 | length 3.3
  Top Layer w0.3: U29.13@114.11,121.412 RSDHIN2.1@117.45,121.412
U29_15: CVS2.1 DVB2.1 U29.15 | length 4
  Top Layer w0.3: U29.15@114.11,123.952 114.13,123.972 CVS2.1@116.167,123.972 118.052,123.972 DVB2.1@118.072,123.952
U29_16: DQH3.1 RQH3.1 U29.16 | length 3.8
  Top Layer w0.3: U29.16@114.11,125.222 DQH3.1@116.548,125.222 116.561,125.235 RQH3.1@116.561,126.619
VBUS: CL7.2 QC.1 QC.2 QC.3 U26.8 USB1.A4B9 USB1.B4A9 | length 21.2
  Top Layer w0.3: v1(73.622,65.024) 74.245,64.402 U26.8@76.437,64.402
  Bottom Layer w0.3: v1(57.62,59.944) 59.017,61.341 69.939,61.341 v1(73.622,65.024)
VCC: C12V4.1 C12V5.1 C12V6.2 C18V1.1 C18V2.1 C18V3.1 CR1.1 CR2.2 CR3.2 CR4.2 CSC2.1 CVC3.2 QH1.2 QH2.2 QH3.2 QREV.1 QREV.2 QREV.3 RDIV1.2 RDIV6.1 RSCR1.2 RSCR2.2 U26.26 U26.27 UPS.2 VDET.2 | length 56.6
  Top Layer w0.254: CR3.2@100.419,54.222 CR2.2@103.848,54.222
  Top Layer w0.3: U26.26@83.253,62.901 96.264,62.901 96.99,63.627 99.276,63.627 99.657,63.246 99.657,62.357 98.857,61.557 CSC2.1@98.768,61.558 98.768,59.817 RSCR1.2@99.612,59.436 99.612,61.549 100.165,62.103 100.165,63.5 99.53,64.135 96.736,64.135 96.002,63.401 U26.27@83.253,63.401
  Top Layer w0.5: CR2.2@103.848,54.222 104.313,53.759 CVC3.2@106.642,53.758
  Top Layer w0.6: CVC3.2@106.642,53.758 107.874,53.759 109.396,52.238 109.396,48.887
  other v1: 94.323,91.059 96.228,91.059 98.26,91.059 95.212,91.821 97.244,91.821 94.323,92.71 96.228,92.71 98.26,92.71 95.212,93.472 97.244,93.472 94.323,94.361 96.228,94.361 98.26,94.361 94.323,100.965 96.101,100.965 98.006,100.965 95.212,101.727 97.117,101.727 94.323,102.489 96.101,102.489 98.006,102.489 93.815,123.952 95.72,123.952 97.752,123.952 94.704,124.841 96.736,124.841 93.815,125.857 95.72,125.857 97.752,125.857
VCC5V: CVC1.2 U26.29 | length 4.6
  Top Layer w0.3: U26.29@83.253,64.401 CVC1.2@87.808,64.389
VCCIO: CVC2.2 U26.32 | length 4.6
  Top Layer w0.3: U26.32@83.253,65.901 CVC2.2@87.808,65.913
VSET: RVSET.1 U26.35 | length 2.7
  Top Layer w0.3: U26.35@83.253,67.401 83.747,67.401 84.671,68.326 RVSET.1@85.568,68.326
pads on no net: 5V_1.A5 5V_1.B5 5V_2.A5 5V_2.B5 U26.1 U26.2 U26.3 U26.6 U26.7 U26.28 U26.31 U26.44 U26.45 U26.47 U26.48 USB1. USB1.A8 USB1.B8

## Polygon pours and split planes (outlines as drawn)
GND on Bottom Layer (solid): 41.999,140.716 41.999,42.545 46.444,38.1 127.597,38.1 131.915,42.418 131.915,139.192 128.74,142.367 45.555,142.494
GND on Top Layer (solid): 73.622,57.404 73.622,45.085 86.576,45.085 86.703,44.958 86.703,57.404 86.83,57.531
GND on Top Layer (solid): 42.761,141.986 42.761,43.815 47.206,39.37 128.359,39.37 132.677,43.688 132.677,140.462 129.502,143.637 46.317,143.764

## Other copper
Top Layer:
  drawing of 379 lines, arcs and shapes, not listed
Bottom Layer:
  region net QL1_2: 80.226,87.884 80.226,83.185 86.068,83.185 86.068,83.947 82.004,88.011 80.226,88.011
  region net QL1_2: 72.479,88.011 72.416,82.867 78.321,82.804 78.321,88.011
  region net VCC: 93.18,95.504 93.18,89.662 99.403,89.662 99.403,95.504
  region net VCC: 93.053,103.505 93.053,100.33 99.276,100.33 99.276,103.505
  region net QL3_2: 85.56,134.747 85.56,128.397 89.116,128.397 90.386,127.127 91.529,127.127 91.529,134.747
  region net VCC: 92.672,126.492 92.672,123.19 98.768,123.19 98.768,126.492
  region net LX1: 66.637,51.435 66.637,46.863 71.717,46.863 71.844,46.863 72.225,47.244 72.225,48.26 71.717,48.768 71.717,51.435
  region net QLT1_5: 66.637,58.547 66.637,53.975 71.717,53.975 71.844,53.975 72.225,54.356 72.225,55.372 71.717,55.88 71.717,58.547
  region net PCON: 93.942,58.547 93.942,53.975 88.862,53.975 88.735,53.975 88.354,54.356 88.354,55.372 88.862,55.88 88.862,58.547
  region net LX2: 88.354,51.435 88.354,46.863 93.434,46.863 93.561,46.863 93.942,47.244 93.942,48.26 93.434,48.768 93.434,51.435
  pour cut-out: 75.908,104.267 75.908,100.838 75.654,99.568 75.654,96.52 79.083,98.933 79.083,101.346 78.194,101.346 78.194,104.267
  pour cut-out: 67.145,96.901 70.447,95.377 73.241,95.504 73.876,95.758 73.241,104.521 79.591,104.521 79.464,106.553 75.019,110.617 69.177,110.617 64.478,106.299 64.478,100.457
  region net 12V: 75.738,101.897 73.538,101.897 73.888,99.647 75.388,99.647
  region net QL1_2: 80.224,101.897 78.974,101.897 79.349,101.147 79.849,101.147
  region net CVCC3_1: 104.158,122.828 103.829,122.5 104.041,122.404 104.253,122.617
  region net CVCC3_1: 111.996,120.451 111.667,120.123 111.572,120.334 111.784,120.547
  region net QH3_3: 93.744,131.083 93.415,130.755 93.556,130.589 93.91,130.942
  region net QH3_3: 118.221,122.633 118.686,122.633 118.703,122.85 118.203,122.85
  region net QL1_2: 112.406,99.208 112.406,99.674 112.189,99.691 112.189,99.191
  region net QL1_1: 75.583,79.356 75.254,79.684 75.395,79.85 75.749,79.497
  region net QL2_1: 83.352,79.142 83.352,79.608 83.569,79.625 83.569,79.125
  region net DQH2_2: 120.886,104.83 120.557,104.502 120.391,104.643 120.745,104.996
  region net DQH2_2: 89.68,104.502 89.351,104.83 89.492,104.996 89.846,104.643
  region net QREV_4: 113.197,60.854 113.197,61.32 113.414,61.237 113.414,60.937
  region net HLED: 56.499,55.323 56.964,55.323 56.854,55.54 56.609,55.54
  region net HLED: 73.576,65.607 73.324,65.998 73.2,65.79 73.335,65.579
  region net VBUS: 73.642,64.715 73.313,65.043 73.237,64.812 73.411,64.639
  region net VBUS: 57.93,59.925 57.601,60.253 57.832,60.329 58.005,60.156
  region net QC_4: 62.651,60.473 62.651,60.939 62.868,60.829 62.868,60.583
  region net QC_4: 73.642,63.826 73.313,64.154 73.237,63.923 73.411,63.75
  region net SDA: 79.386,71.522 79.386,71.988 79.169,71.878 79.169,71.632
  region net QREV_4: 120.378,61.921 120.049,62.249 119.954,62.038 120.166,61.825
  region net LDO_3: 107.482,45.741 107.482,46.207 107.699,46.174 107.699,45.774
  region net LDO_3: 118.094,60.628 118.559,60.628 118.526,60.411 118.126,60.411
  region net CC1: 51.072,71.482 50.743,71.81 50.971,71.889 51.151,71.71
  region net CC1: 79.894,72.157 79.894,72.623 79.677,72.517 79.677,72.263
  region net SDA: 50.276,52.656 50.741,52.656 50.631,52.873 50.386,52.873
  pour cut-out net 5V: 80.226,131.826 81.877,131.826 81.877,128.27 83.274,128.27 83.274,126.492 80.734,123.952 80.734,131.445
  pour cut-out net 5V: 76.67,131.953 76.67,125.222 74.638,123.444 71.971,123.444 68.288,127.127 68.288,133.096 73.368,137.922 78.321,138.049 82.766,134.112 81.877,133.477 81.877,132.08 81.75,131.953
  pour cut-out: 64.605,104.394 79.337,104.394 79.464,104.521 79.464,106.553 74.765,111.252 69.431,111.252 64.732,106.553
  pour cut-out net BAT_M: 77.813,70.866 77.813,70.612 77.051,70.612 75.654,69.088 75.654,70.866
  pour cut-out net LX1: 76.67,51.498 76.67,51.562 76.67,53.848 76.416,54.102 73.114,54.102 73.114,57.468 73.114,57.785 76.416,57.785 76.416,58.293 78.956,58.293 78.956,57.785 78.956,53.721 76.67,51.498 76.67,51.562
  pour cut-out net DEMK_1: 73.495,57.531 73.495,46.863 74.511,45.974 85.814,45.974 86.83,46.863 86.83,57.404

## Silkscreen, mask and mechanical layers (free items; w line width, h text height)
Top Overlay:
  rectangle: 46.19,75.311 127.978,75.819
  rectangle: 46.19,109.474 127.978,109.982
  rectangle: 46.19,139.192 127.978,139.7
  circle w0.1: c112.992,72.771 r0.8
  circle w0.1: c113.053,86.616 r0.8
  circle w0.1: c111.087,56.007 r0.8
  circle w0.1: c57.988,97.639 r0.8
  circle w0.1: c57.906,80.97 r0.8
  text "Power Delivery Board" at 98.767,136.097 h2.5
  text "5V DC" at 51.524,136.029 h1.5
  text "Vin: 18~25V" at 101.018,133.234 h1.5
  text "Vout: PD/12V/5V" at 101.054,131.191 h1.5
  text "Buck-Boost" at 60.16,130.683 h1.5
  text "Desginer: pomelo925" at 110.117,129.228 h1.5
  text "外置NMOS同步整流" at 55.588,128.778 h1.5
  text "EG Micro EG1162" at 110.142,112.598 h1.5
  text "12V DC" at 57.366,106.438 h1.5
  text "EG Micro EG1162" at 106.426,103.708 h1.5
  text "+" at 57.455,97.561 h0.7 r225
  text "+" at 113.015,86.539 h0.7 r135
  text "UPS" at 111.849,83.828 h1
  text "+" at 57.373,80.892 h0.7 r225
  text "Vdet" at 111.214,73.541 h1
  text "+" at 112.459,72.693 h0.7 r225
  text "PD/QC" at 47.259,72.023 h1.5 r4
  text "~60W" at 53.681,61.744 h1
  text "INJOINIC IP2368" at 84.036,61.595 h1.5 r1
  text "100W" at 53.634,58.279 h1
  text "EMARK" at 53.75,56.792 h1
  text "Vin" at 109.962,56.777 h1 r2
  text "+" at 111.049,55.929 h0.7 r135
Top Solder:
  lines w0.356: 82.639,60.071 84.798,60.071